# Altium PCB tl.PcbDoc
Units mm, origin at the board's own origin, x right, y up, seen from the top; angles counter-clockwise.
Board outline 131.87 x 43.9 mm, 2 copper layers (Top Layer, Bottom Layer); 2 components, 2 nets, 10 pads, 32 vias.
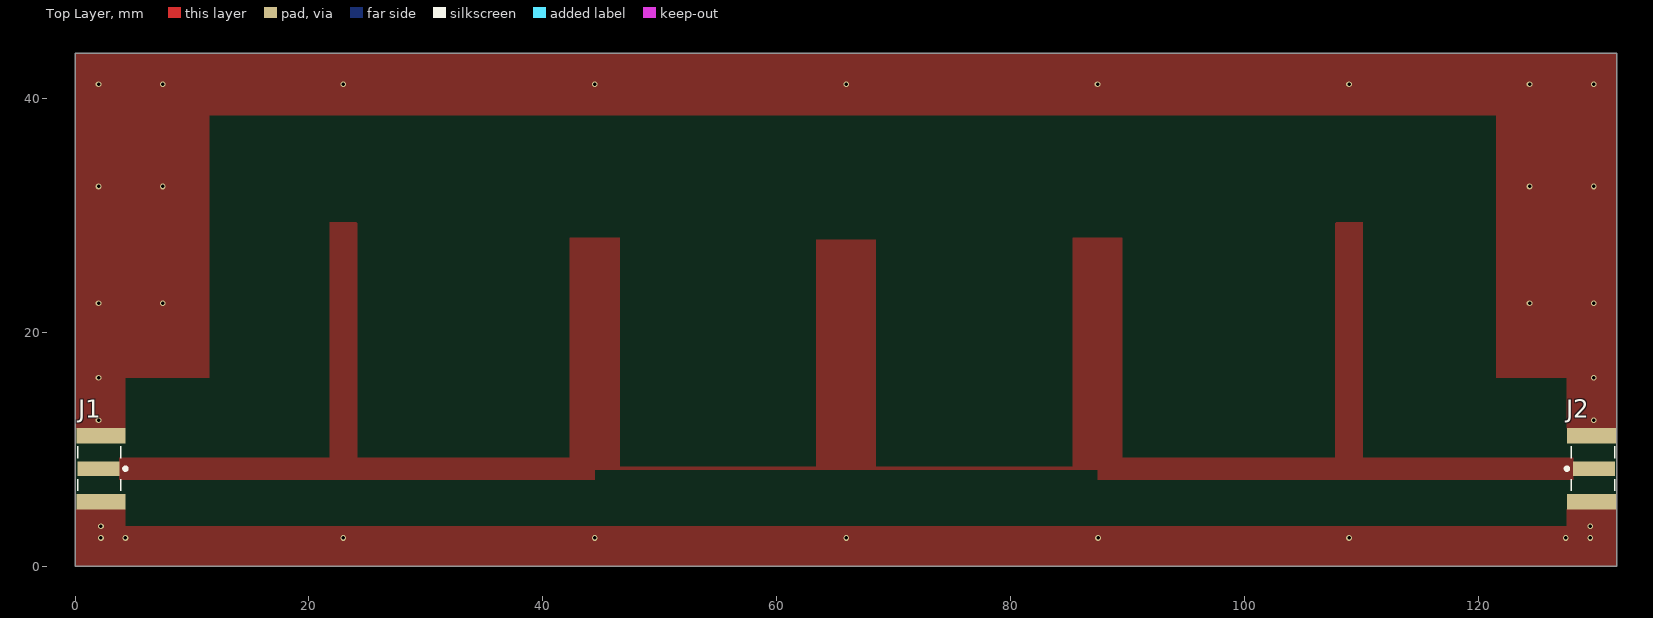
[diagram p0: Top Layer view]
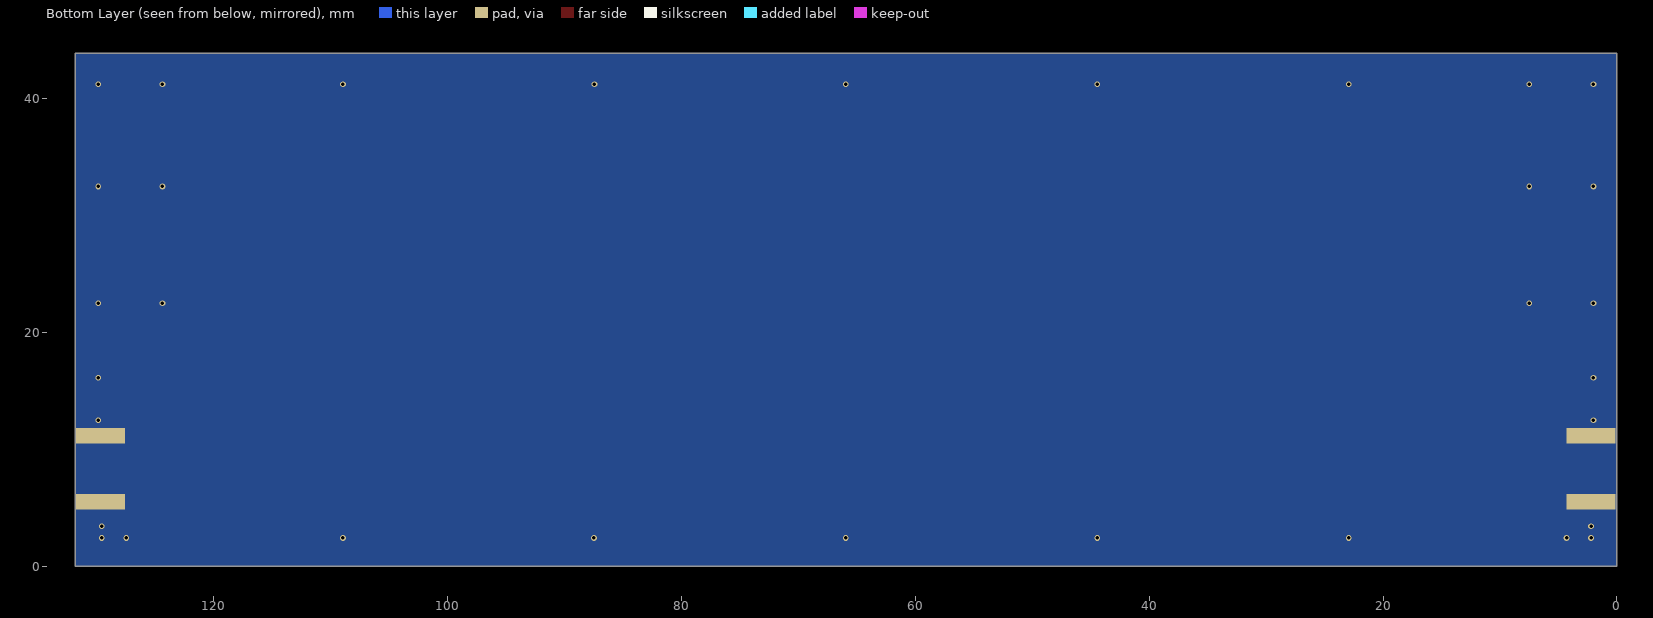
[diagram p1: Bottom Layer view, seen from below]

## Layer stack, top to bottom
Top Solder: solder mask 0.0102, Solder Resist, Dk 3.5
Top Layer: signal copper 0.0356
Dielectric 1: dielectric 0.32, FR-4, Dk 4.8
Bottom Layer: signal copper 0.0356
Bottom Solder: solder mask 0.0102, Solder Resist, Dk 3.5

## Board outline
0,0 0,43.9 131.875,43.9 131.875,0

## Design rules (kind name [scope] priority, off if disabled: settings)
Clearance [All] p1: gap=0.254 ignorepadtopadclearanceinfootprint=FALSE except(0: Arc-Hole Track-Hole SMDPad-Hole THPad-Hole Via-Hole Fill-Hole Poly-Hole Region-Hole Text-Hole)
PlaneConnect [All] p1: planeconnectstyle=Direct reliefexpansion=0.508 reliefentries=4 reliefconductorwidth=0.254 reliefairgap=0.254
PolygonConnect [All] p1: connectstyle=Direct reliefconductorwidth=0.254 reliefentries=4 polygonreliefangle="90 Angle" airgapwidth=0.254
RoutingVias [All] p1: holewidth=0.711 width=1.27 viastyle="Through Hole" minholewidth=0.711 minwidth=1.27 maxholewidth=0.711 maxwidth=1.27
SolderMaskExpansion [All] p1: expansion=0.102 istentingtop=FALSE
Width [All] p1: maxlimit=6 minlimit=0.2 preferedwidth=0.3
29 further rules are at their usual default settings.

## Classes and differential pairs
component class tl: J1

## Components (designator, comment, footprint, x,y, rotation, side; value= is the part's Value field where it differs from the comment)
J1 "SMA-J-P-H-ST-EM1" SMA-J-P-H-ST-EM1_SMA-J-P-H-ST-EM1(Primary) 2.009,8.352 r270 top
J2 "SMA-J-P-H-ST-EM1" SMA-J-P-H-ST-EM1_SMA-J-P-H-ST-EM1(Primary) 129.898,8.352 r90 top

## Footprints (in the part's own frame and the unit in brackets; to place one, negate y for a bottom-side part, rotate by r counter-clockwise, add the part's x,y. Pads: shape width x height; smd on the part's side, far side on the other; paste and mask are expansions set on the pad)
SMA-J-P-H-ST-EM1_SMA-J-P-H-ST-EM1(Primary) [mm]
  rect 1.27x3.6 smd: 1(0,0)
  rect 1.35x4.2 smd: 2_1(-2.825,0.2) 3_1(2.825,0.2)
  rect 1.35x4.2 smd far side: 2_2(-2.825,0.2) 3_2(2.825,0.2)
  silkscreen extent -1.9,-1.8 1.9,2.44

## Part data
J1 J2: "SMA Connector Jack, Female Socket 50Ohm Board Edge, End Launch Solder", Package=None, Availability=Unavailable, MF=Samtec, MP=SMA-J-P-H-ST-EM1, Price=None, SnapEDA_Link=https://www.snapeda.com/parts/SMA-J-P-H-ST-EM1/Samtec%20Inc./view-part/134500/?ref=snap

## Via types
v1: diameter 0.5, hole 0.3, Top Layer to Bottom Layer, tented both sides, 32 vias

## Nets (pads, with @x,y where several pads share a name; then routed paths per layer and width w, separated by ;. In a path a pad name is that pad's centre, name@x,y a point inside that pad or via, vN(x,y) a via of type N, cw(c..) or ccw(c..) an arc to the next point about the centre after c; other vN are vias at no path point)
GND: J1.2_1 J1.2_2 J1.3_1 J1.3_2 J2.2_1 J2.2_2 J2.3_1 J2.3_2
  other v1: 2.209,2.437 4.3,2.437 22.943,2.437 44.449,2.437 65.953,2.437 87.5,2.437 108.963,2.437 127.5,2.437 129.591,2.437 2.209,3.425 129.591,3.425 2.009,12.5 129.898,12.5 2.009,16.125 129.898,16.125 2.009,22.5 7.5,22.5 124.407,22.5 129.898,22.5 2.009,32.5 7.5,32.5 124.407,32.5 129.898,32.5 2.009,41.237 7.5,41.237 22.943,41.237 44.449,41.237 65.953,41.237 87.457,41.237 108.963,41.237 124.407,41.237 129.898,41.237
TL: J1.1 J2.1

## Polygon pours and split planes (outlines as drawn)
GND on Top Layer "Top Layer-GND" (solid, pour order 36): 11.475,43.9 11.475,38.575 121.55,38.575 121.55,43.9
GND on Top Layer "Top Layer-GND 1" (solid, pour order 34): 131.875,11.825 127.575,11.825 127.575,16.125 121.55,16.125 121.55,43.9 131.875,43.9
GND on Top Layer "Top Layer-GND 2" (solid, pour order 32): 0,11.825 4.3,11.825 4.3,16.125 11.475,16.125 11.475,43.9 0,43.9
GND on Top Layer "Top Layer-GND 3" (solid, pour order 28): 0,0 0,4.875 131.875,4.875 131.875,0
TL on Top Layer "Top Layer-TL" (solid, pour order 26): 128.119,7.412 107.788,7.412 107.788,9.292 128.119,9.292
TL on Top Layer "Top Layer-TL 1" (solid, pour order 24): 107.788,9.292 110.137,9.292 110.137,29.425 107.788,29.425
TL on Top Layer "Top Layer-TL 2" (solid, pour order 22): 107.788,7.412 87.457,7.412 87.457,9.292 107.788,9.292
TL on Top Layer "Top Layer-TL 3" (solid, pour order 20): 87.457,8.256 65.953,8.256 65.953,8.512 87.457,8.512
TL on Top Layer "Top Layer-TL 4" (solid, pour order 18): 89.586,8.512 85.328,8.512 85.328,28.097 89.586,28.097
TL on Top Layer "Top Layer-TL 5" (solid, pour order 16): 63.413,8.512 68.493,8.512 68.493,27.936 63.413,27.936
TL on Top Layer "Top Layer-TL 6" (solid, pour order 14): 42.32,8.512 46.578,8.512 46.578,28.097 42.32,28.097
TL on Top Layer "Top Layer-TL 7" (solid, pour order 10): 44.449,8.256 65.953,8.256 65.953,8.512 44.449,8.512
TL on Top Layer "Top Layer-TL 8" (solid, pour order 6): 24.118,7.412 44.449,7.412 44.449,9.292 24.118,9.292
TL on Top Layer "Top Layer-TL 9" (solid, pour order 4): 24.118,9.292 21.769,9.292 21.769,29.425 24.118,29.425
TL on Top Layer "Top Layer-TL 10" (solid, pour order 2): 3.787,7.412 24.118,7.412 24.118,9.292 3.787,9.292
GND on Bottom Layer "Bottom Layer-GND" (solid, pour order 38): 0,0 0,43.9 131.875,43.9 131.875,0
no net on Top Solder "Bottom Layer-GND" (solid, pour order 39): 0,0 0,43.9 131.875,43.9 131.875,0

## Other copper
Top Layer:
  pour cut-out: 4.3,6.2 4.3,3.425 127.6,3.425 127.6,6.2

## Silkscreen, mask and mechanical layers (free items; w line width, h text height)
Mechanical 1:
  the board outline again, w0.2